# EAGLE board sample (EAGLE 9.5.2)
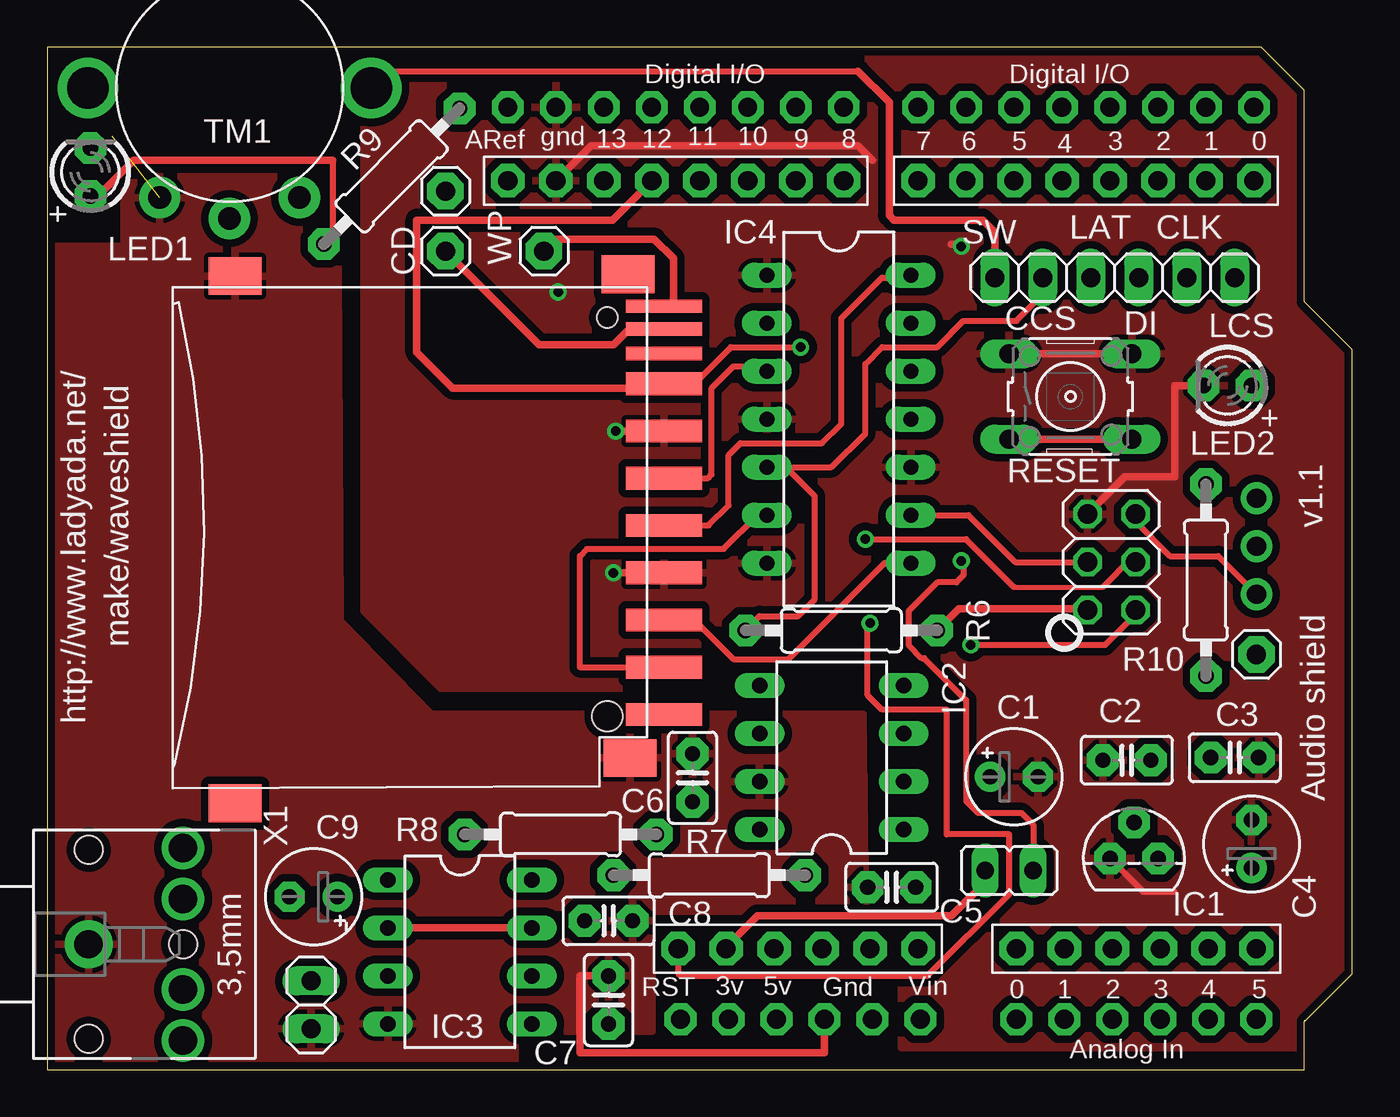
[diagram p0: board, top side]
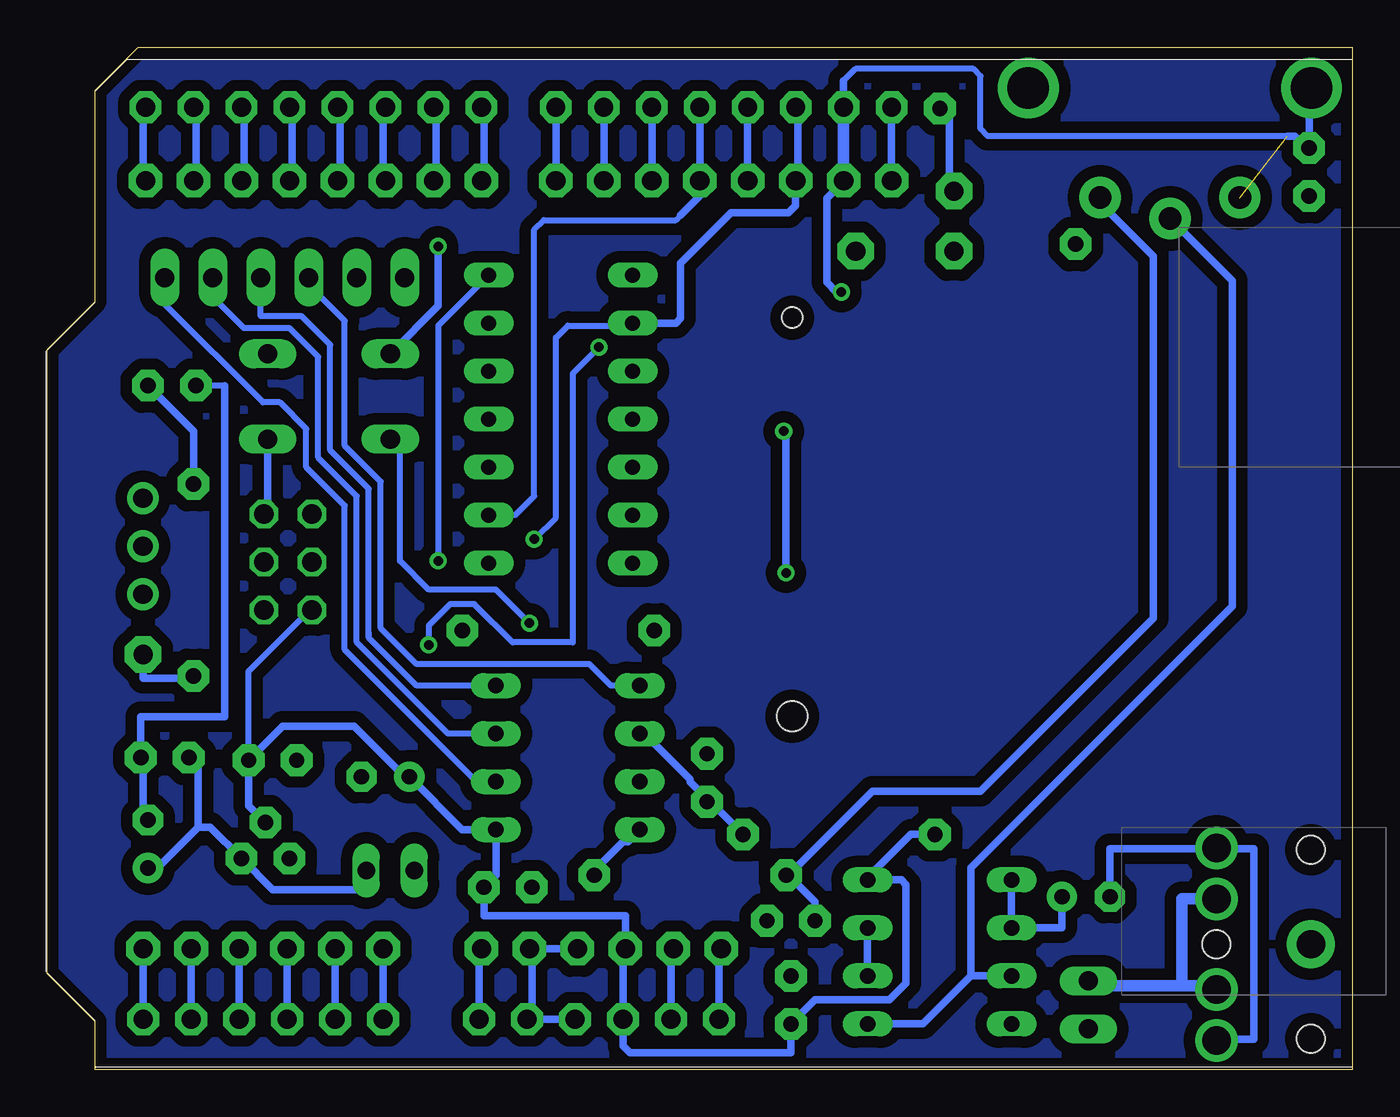
[diagram p1: board, bottom side, seen from below]

Size 69.09 x 54.1 mm. Coordinates in mm from the lower left corner, seen from the top.
Outline: 0,54.1 0,0 66.55,0 66.55,2.54 69.09,5.08 69.09,38.1 66.55,40.64 66.55,51.82 64.26,54.1 0,54.1
Copper layers (1*16): Top 0.035mm / dielectric 1.5mm / Bottom 0.035mm
Design rules "default": minimum track width 10mil, minimum drill 19mil, track to track 12mil, track to pad 12mil, pad to pad 12mil, via to via 12mil, smd to smd 0mil, copper to edge 10mil, drill to drill 8mil, minimum pad ring 10mil, minimum via ring 8mil, stop-mask expansion 4mil, vias tented up to drill 20mil, thermal gap 10mil

## Footprints (pad centres in the part's own frame; a part is rotated, then mirrored left to right if it is on the bottom)
E2,5-5 = drill 0.813 pad 1.6: + -1.27,0 | drill 0.813 pad 1.6 octagon: - 1.27,0
C025-025X050 = drill 0.813 pad 1.676 octagon: 1 -1.27,0; 2 1.27,0
1X01 = drill 1.016 pad 1.93 octagon: 1 0,0
TO92 = drill 0.813 pad 1.676 octagon: 1 -1.27,0; 2 0,1.905; 3 1.27,0
DIL08 = drill 0.813 long: 1 -3.81,-3.81; 2 -1.27,-3.81; 3 1.27,-3.81; 4 3.81,-3.81; 5 3.81,3.81; 6 1.27,3.81; 7 -1.27,3.81; 8 -3.81,3.81
DIL14-LARDO = drill 0.813 long: 1 -7.62,-3.81; 2 -5.08,-3.81; 3 -2.54,-3.81; 4 0,-3.81; 5 2.54,-3.81; 6 5.08,-3.81; 7 7.62,-3.81; 8 7.62,3.81; 9 5.08,3.81; 10 2.54,3.81; 11 0,3.81; 12 -2.54,3.81; 13 -5.08,3.81; 14 -7.62,3.81
2X03 = drill 1.016 octagon: 1 -2.54,-1.27; 2 -2.54,1.27; 3 0,-1.27; 4 0,1.27; 5 2.54,-1.27; 6 2.54,1.27
1X03-CLEANBIG = drill 1.016 pad 1.676: 1 -2.54,0; 2 0,0; 3 2.54,0
1X08-BIG = drill 1.016 pad 1.778 octagon: 1 -8.89,0; 2 -6.35,0; 3 -3.81,0; 4 -1.27,0; 5 1.27,0; 6 3.81,0; 7 6.35,0; 8 8.89,0
1X06-BIG = drill 1.016 pad 1.778 octagon: 1 -6.35,0; 2 -3.81,0; 3 -1.27,0; 4 1.27,0; 5 3.81,0; 6 6.35,0
1X02 = drill 1.016 long: 1 -1.27,0; 2 1.27,0
JP1 = drill 0.914 long: 1 0,-1.27; 2 0,1.27
1X06 = drill 1.016 long: 1 -6.35,0; 2 -3.81,0; 3 -1.27,0; 4 1.27,0; 5 3.81,0; 6 6.35,0
LED3MM = drill 0.813 pad 1.676 octagon: A -1.27,0; K 1.27,0
0207/10 = drill 0.813 pad 1.676 octagon: 1 -5.08,0; 2 5.08,0
B3F-10XX = drill 1.016 long: 1 -3.251,2.261; 2 3.251,2.261; 3 -3.251,-2.261; 4 3.251,-2.261
THUMBWHEEL = drill 1.2 pad 2.184: 1 -3.7,-5.8; 2 0,-6.9; 3 3.7,-5.8 | drill 2.2: SW1 -7.5,0; SW2 7.5,0
ARDUINO-NODIM = drill 1 pad 1.676 octagon: 3V 36.068,2.54; 5V 38.608,2.54; A0 51.308,2.54; A1 53.848,2.54; A2 56.388,2.54; A3 58.928,2.54; A4 61.468,2.54; A5 64.008,2.54; AREF 24.384,50.8; D0 63.881,50.8; D1 61.341,50.8; D2 58.801,50.8; D3 56.261,50.8; D4 53.721,50.8; D5 51.181,50.8; D6 48.641,50.8; D7 46.101,50.8; D8 42.164,50.8; D9 39.624,50.8; D10 37.084,50.8; D11 34.544,50.8; D12 32.004,50.8; D13 29.464,50.8; GND 26.924,50.8; GND1 43.688,2.54; GND2 41.148,2.54; RESET 33.528,2.54; VIN 46.228,2.54
06132 = smd 1.2 x 4: 1 6.9,0.9; 2 4.4,0.9; 3 1.9,0.9; 4 -0.6,0.9; 5 -3.1,0.9; 6 -5.6,0.9; 7 -8.1,0.9; 9 9.4,0.9 | smd 0.7 x 4: 8 -9.7,0.9; CD -11,0.9; WP -12.2,0.9 | smd 2 x 2.8: GP -13.8,-21.8; GP2 14.1,-21.8; GP3 11.7,-0.9; GP4 -13.9,-1 | hole 1.1: -11.6,-2.1 | hole 1.6: 9.5,-2.1
STX3100 = drill 1.5 pad 2.54: 1 2.7,-0.1 | drill 1.5: 2 7.7,5; 3 7.7,2.3; 4 7.7,-2.5; 5 7.7,-5.2 | hole 1.5: 2.7,4.9; 2.7,-5.1; 7.7,-0.1

## Placement (x,y rotation side)
C1  100uF/6V  [E2,5-5]  51.18,15.49 0 top
C2  0.1uF  [C025-025X050]  57.16,16.37 180 top
C3  0.1uF  [C025-025X050]  62.87,16.51 0 top
C4  100uF/6V  [E2,5-5]  63.75,11.94 90 top
C5  0.1uF  [C025-025X050]  44.7,9.65 180 top
C6  0.1uF  [C025-025X050]  34.16,15.44 90 top
C7  0.1uF  [C025-025X050]  29.72,3.68 90 top
C8  0.01uF  [C025-025X050]  29.72,7.87 0 top
C9  100uF/6V  [E2,5-5]  14.1,9.14 180 top
CD  [1X01]  21.08,43.31 0 top
IC1  [TO92]  57.53,11.18 0 top
IC2  MCP4921  [DIL08]  41.53,16.51 90 top
IC3  TL072P  [DIL08]  21.84,6.22 270 top
IC4  74125N-LARDO  [DIL14-LARDO]  41.91,34.42 270 top
ICSP  [2X03]  56.34,26.86 90 top
JP1  [1X03-CLEANBIG]  64.02,27.69 270 top
JP2  [1X08-BIG]  33.27,47.04 0 top
JP4  [1X08-BIG]  54.99,47.04 180 top
JP7  [1X06-BIG]  39.75,6.4 180 top
JP9  [1X06-BIG]  57.66,6.4 0 top
JP11  [1X02]  13.97,3.43 90 top
JP12  [JP1]  50.93,10.54 90 top
JP13  [1X06]  56.52,41.91 180 top
LED1  [LED3MM]  2.29,47.5 90 top
LED2  [LED3MM]  62.48,36.2 180 top
R6  10K  [0207/10]  42.04,23.24 180 top
R7  1.5K  [0207/10]  35.05,10.29 0 top
R8  100K  [0207/10]  27.18,12.45 0 top
R9  4.7K  [0207/10]  18.24,47.27 45 top
R10  4.7K  [0207/10]  61.34,25.91 90 top
RESET  Reset  [B3F-10XX]  54.17,35.62 0 top
TM1  THUMBPOT  [THUMBWHEEL]  9.65,51.94 0 top
U$1  ARDUINODUEMILANOVE-NODIM  [ARDUINO-NODIM]  0,0.13 0 top
U$2  SDMMC06132  [06132]  31.75,28.19 270 top
WP  [1X01]  26.29,43.31 0 top
WP1  [1X01]  21.08,46.48 0 top
WP2  [1X01]  64.01,21.97 0 top
X1  STEREOJACK  [STX3100]  -0.51,6.73 0 top

## Library data of the parts
C1-C9 CD IC1 IC2 IC4 JP1 JP2 JP4 JP7 JP9 LED1 LED2 R6-R10 TM1 U$1 U$2 WP WP1 WP2 X1 = adafruit
IC3 = linear
ICSP JP11 JP13 = pinhead
JP12 = jumper
RESET = switch-omron

## Nets
3.3V: JP7.5 JP12.2 U$1.3V
+3V3: C3.1 C4.+ IC1.3 IC4.14 JP12.1 U$2.4
+5V: C1.+ C2.1 C5.1 C7.1 IC1.2 IC2.1 IC3.8 ICSP.2 JP7.4 R6.1 R8.1 U$1.5V
DAC_CS: IC2.2 JP13.1
DAC_DI: IC2.4 JP13.3
DAC_LATCH: IC2.5 JP13.4
DAC_SCK: IC2.3 JP13.2
GND: C1.- C2.2 C3.2 C4.- C5.2 C6.2 C7.2 C8.2 IC1.1 IC2.7 IC3.4 IC4.1 IC4.4 IC4.7 IC4.10 ICSP.6 JP2.2 JP7.2 JP7.3 JP11.1 LED1.K LED2.K RESET.1 RESET.2 TM1.1 TM1.SW1 U$1.GND U$1.GND1 U$1.GND2 U$2.3 U$2.6 U$2.GP U$2.GP3 X1.1
MISO: ICSP.1 JP2.4 U$1.D12 U$2.7
MMC_CS: IC4.5 JP13.5 R6.2
MOSI: IC4.9 ICSP.4 JP2.5 U$1.D11
N$1: IC3.3 IC3.5 TM1.2
N$2: C9.- X1.2 X1.5
N$3: C9.+ IC3.1 IC3.2 IC3.6 IC3.7
N$4: IC2.8 R7.2
N$5: JP11.2 X1.3 X1.4
N$6: JP9.1 U$1.A0
N$7: JP9.2 U$1.A1
N$8: CD.1 U$2.CD
N$9: JP9.3 U$1.A2
N$10: IC4.6 U$2.1
N$11: IC4.8 U$2.2
N$12: IC4.3 U$2.5
N$13: U$2.WP WP.1
N$14: LED1.A R9.1
N$15: JP7.1 U$1.VIN
N$17: R9.2 WP1.1
N$18: LED2.A R10.2
N$19: C6.1 IC2.6 R8.2
N$20: R10.1 WP2.1
N$21: C8.1 R7.1 TM1.3
N$22: JP9.4 U$1.A3
N$23: JP9.5 U$1.A4
N$24: JP9.6 U$1.A5
N$25: JP4.1 U$1.D0
N$26: JP4.2 U$1.D1
N$27: JP4.3 U$1.D2
N$28: JP4.4 U$1.D3
N$29: JP4.5 U$1.D4
N$30: JP4.6 U$1.D5
N$31: JP4.7 U$1.D6
N$32: JP4.8 U$1.D7
N$33: JP2.1 U$1.AREF
N$34: JP2.6 U$1.D10
N$35: JP2.7 U$1.D9
N$36: JP2.8 U$1.D8
POTSW: JP13.6 TM1.SW2
RESET: ICSP.5 JP1.3 JP7.6 RESET.3 RESET.4 U$1.RESET
SCK: IC4.2 ICSP.3 JP2.3 U$1.D13

## Tracks (layer width: path | path; a pad name or v marks a point on that pad's centre or on a via)
3.3V
  Top 0.406: JP12.2 49.53,10.41 | JP7.5 35.94,6.48 37.59,8.13 47.88,8.13 49.66,9.91 JP12.2 | JP12.2 49.53,10.67
  Bottom 0.406: 35.94,6.48 JP7.5 35.99,6.35 36.07,6.35 U$1.3V
+3V3  (via drill 0.5)
  Top 0.305: IC4.14 45.72,41.91 44.2,41.91 42.04,39.75 42.04,34.16 41.02,33.15 36.7,33.15 36.07,32.51 36.07,29.84 35.02,28.79 U$2.4 | v48.39,26.92 48.51,26.8 48.51,26.16 48.13,25.78 47.12,25.78 45.59,24.26 45.59,22.48 46.29,21.78 46.42,21.78 48.64,19.56 48.64,14.22 49.28,13.59 51.56,13.59 52.2,12.95 52.2,11.56
  Top 0.406: JP12.1 52.2,10.41 | 52.2,11.56 JP12.1 | JP12.1 52.07,10.67 51.94,10.67 51.94,9.65 | 51.82,10.41 51.94,10.54 JP12.1 | U$2.4 32.55,28.79
  Bottom 0.305: IC4.14 48.39,39.37 v48.39,26.92
  Bottom 0.406: C3.1 61.09,16 61.09,12.83 | 64.01,10.67 C4.+ 63.25,10.67 61.09,12.83 | 61.09,12.83 60.45,12.83 IC1.3 57.15,9.53 52.58,9.53 52.07,10.03 52.07,10.67 | 52.07,10.67 52.07,10.79 | JP12.1 52.07,10.67
+5V
  Top 0.406: ICSP.2 55.12,24.36 55.12,24.38 48.26,24.38 R6.1
  Bottom 0.305: ICSP.2 55.08,24.34 55.12,24.38 58.42,21.08 C2.1
  Bottom 0.406: IC1.2 58.42,13.97 C2.1 56.64,18.16 52.83,18.16 50.29,15.62 49.78,15.62 C1.+ 47.12,12.7 IC2.1 45.34,11.05 | 45.34,11.05 45.34,10.92 | 45.34,11.05 45.34,10.29 C5.1 45.97,8.13 38.48,8.13 JP7.4 38.61,6.4 U$1.5V 38.61,1.27 38.23,0.89 29.72,0.89 C7.1 28.45,3.68 24.51,3.68 23.62,4.57 23.62,9.78 23.88,10.03 IC3.8 25.65,10.16 23.37,12.45 R8.1
DAC_CS
  Bottom 0.305: JP13.1 62.87,40.51 57.66,35.31 56.77,35.31 55.37,33.91 55.37,31.88 53.34,29.84 53.34,22.23 46.35,15.24 IC2.2
DAC_DI
  Bottom 0.305: JP13.3 57.78,39.88 55.63,39.88 54.1,38.35 54.1,32.77 52.07,30.73 52.07,23.11 | 52.07,23.11 52.07,22.99 | IC2.4 49.53,20.32 52.07,22.86 52.07,23.11
DAC_LATCH
  Bottom 0.305: 55.24,41.66 JP13.4 55.24,41.53 53.34,39.62 53.34,33.02 51.44,31.11 51.44,23.37 49.53,21.46 40.39,21.46 39.24,20.32 IC2.5 | IC2.5 37.85,20.45 | IC2.5 37.59,20.32
DAC_SCK
  Bottom 0.305: JP13.2 60.2,41.78 60.33,41.66 60.33,40.89 58.67,39.24 56.26,39.24 54.74,37.72 54.74,32.38 52.7,30.35 52.7,22.61 47.88,17.78 IC2.3
GND  (via drill 0.5)  (1 unrouted)
  Top 0.305: IC1.1 58.04,9.4 59.69,9.4 | 63.37,13.21 C4.-
  Top 0.406: 27.05,47.37 27.05,47.17 JP2.2 28.78,48.9 42.93,48.9 43.69,48.13 | RESET.2 57.18,37.88 57.15,37.85 57.12,37.88 RESET.1 | ICSP.6 57.05,31.37 59.69,31.37 59.69,36.2 LED2.K | C7.2 28.19,4.95 28.19,0.89 41.15,0.89 U$1.GND2 | U$2.6 32.64,33.78 v30.1,33.78 | U$2.3 32.77,26.29 | U$2.3 | v29.97,26.29 U$2.3 | v48.39,43.56 48.26,43.69 47.88,43.69
  Bottom 0.305: 3.43,49.4 19.3,49.4 19.68,49.78 19.68,52.58 20.07,52.96 26.29,52.96 26.92,52.32 | 59.69,36.2 LED2.K
  Bottom 0.406: 43.18,6.48 43.26,6.4 JP7.2 43.51,6.35 43.43,6.35 43.43,3.05 | 43.18,6.48 43.1,6.4 JP7.3 41.02,6.99 | C4.- 64.01,13.46 64.01,16.64 C3.2 64.14,18.67 59.69,18.67 59.69,36.2 | 43.43,3.05 43.43,2.85 | 26.8,47.12 26.85,47.12 JP2.2 | 43.18,6.48 42.93,6.48 | 26.92,46.99 27.81,46.1 27.81,41.66 27.3,41.15 v27.05,41.15 | TM1.SW1 2.15,51.81 2.03,51.69 2.29,51.44 LED1.K 2.29,48.64 3.05,49.4 3.43,49.4 | v30.1,33.78 29.97,33.66 v29.97,26.29 | RESET.1 48.39,40.41 v48.39,43.56 | 43.43,2.67 U$1.GND1 | U$1.GND2 43.43,2.67 | 26.92,52.32 U$1.GND | 43.43,2.67 43.43,3.05
  Bottom 0.61: 26.92,46.99 JP2.2 26.92,50.72 26.8,50.72
  pour Top (isolate 0.406): 4.06,47.24 4.06,43.56 0.13,43.56 0.13,-0.89 24.77,-0.89 24.77,2.03 32,2.03 32,8.38 43.31,8.38 43.18,18.8 20.32,18.8 15.49,23.75 15.37,47.24
  pour Top (isolate 0.406): 16.76,53.09 16.76,24.26 20.83,20.19 45.21,20.19 45.21,1.14 66.17,1.14 66.17,2.92 68.71,5.46 68.71,38.48 66.42,40.77 66.42,51.82 64.77,53.47 16.38,53.47
MISO  (via drill 0.5)
  Top 0.305: ICSP.1 57.61,24.17 57.66,24.13 56.01,22.48 v48.9,22.48 | 34.16,36.07 34.16,36.2 36.2,38.23 v39.88,38.23
  Top 0.406: JP2.4 29.92,44.96 19.56,44.96 19.56,37.97 21.46,36.07 32.64,36.07 | 32.64,36.07 32.64,36.08 | 32.64,36.07 34.16,36.07 | U$2.7 32.64,36.32 | U$2.7 | 32.64,36.07 U$2.7
  Bottom 0.305: v39.88,38.23 41.27,36.83 41.27,22.61 44.45,22.61 46.48,24.64 47.75,24.64 48.9,23.5 v48.9,22.48 48.9,22.35
  Bottom 0.406: JP2.4 U$1.D12
MMC_CS
  Top 0.305: 38.23,31.88 39.12,31.88 40.64,30.35 40.64,24.89 39.75,24 37.72,24 R6.2 | JP13.5 52.7,41.02 51.31,39.62 48.51,39.62 47.12,38.23 44.2,38.23 43.31,37.34 43.31,33.66 41.53,31.88 38.23,31.88 | 38.23,31.88 IC4.5
MOSI
  Top 0.305: ICSP.4 51.25,26.86 48.77,29.34 IC4.9
  Bottom 0.305: 35.56,45.21 35.81,44.96 42.8,44.96 43.31,44.45 43.31,30.35 44.32,29.34 IC4.9
  Bottom 0.406: 34.54,46.99 JP2.5 34.47,47.12 | 34.47,47.12 34.42,47.12 34.42,46.35 35.56,45.21 | 34.47,47.12 34.54,47.19 U$1.D11
N$1
  Bottom 0.406: IC3.3 20.19,4.95 | 20.19,4.95 22.73,2.41 25.02,2.41 25.15,2.54 25.53,2.54 IC3.5 | TM1.2 6.35,41.74 6.35,24.51 20.19,10.67 20.19,4.95
N$2
  Bottom 0.406: C9.- 12.83,11.68 7.11,11.68 7.16,11.73 X1.2 7.19,11.89 | X1.5 7.12,1.53 7.11,1.52 7.03,1.61 5.21,1.61 5.21,11.68 6.99,11.68 7.19,11.89 | 7.19,11.89 7.24,11.94
N$3
  Top 0.406: 17.91,7.49 IC3.2 IC3.7
  Bottom 0.406: 25.65,7.62 IC3.7 IC3.6 | IC3.2 18.16,7.62 18.29,7.49 | IC3.2 IC3.1 | IC3.2 15.37,7.49 C9.+
N$4
  Bottom 0.406: IC2.8 38.35,12.06 38.61,12.06 40.26,10.41 R7.2
N$5
  Bottom 0.61: X1.4 7.19,4.45 9.02,4.45 | JP11.2 13.97,4.45 9.02,4.45 | X1.3 9.02,9.03 9.02,4.45
N$6
  Bottom 0.406: 51.31,6.6 JP9.1 U$1.A0
N$7
  Bottom 0.406: U$1.A1 JP9.2
N$8
  Top 0.406: CD.1 26.04,38.35 29.97,38.35 30.73,39.12 32.51,39.12 32.38,39.24 32.64,39.24 | 32.64,39.24 U$2.CD | 32.64,39.24 32.66,39.24
N$9
  Bottom 0.406: U$1.A2 JP9.3
N$10
  Top 0.305: U$2.1 28.19,21.29 28.19,27.18 28.57,27.56 35.81,27.56 37.59,29.34 IC4.6
N$11
  Top 0.305: 32.77,23.88 34.16,23.88 36.32,21.72 39.24,21.72 44.32,26.8 IC4.8
  Top 0.406: 32.68,23.79 32.77,23.88 | U$2.2 32.68,23.79 | 32.68,23.79 32.66,23.77
N$12
  Top 0.305: U$2.5 34.98,31.29 35.18,31.5 35.18,36.07 36.32,37.21 37.72,37.21 37.85,37.21 IC4.3
N$13
  Top 0.406: WP.1 26.92,43.94 32.13,43.94 33.15,42.93 33.15,40.39 33.02,40.26 32.64,40.26 U$2.WP
N$14
  Top 0.305: 15.11,48.09 15.11,43.94
  Top 0.406: 15.11,48.09 15.11,48.13 4.57,48.13 2.67,46.23 LED1.A | R9.1 14.61,43.68 14.61,43.69 14.86,43.94 15.11,43.94
N$15
  Bottom 0.406: JP7.1 46.23,6.4 U$1.VIN
N$16
  pour Bottom (isolate 0.61): -0.38,53.59 -0.38,0.38 66.55,0.13 66.55,3.43 68.96,5.84 69.09,37.97 66.67,40.13 66.67,52.58 65.91,53.59
N$17
  Bottom 0.406: WP1.1 21.34,46.74 21.34,50.43 21.35,50.43 21.83,50.91 | 21.83,50.91 21.84,50.93 | 21.83,50.91 R9.2
N$18
  Bottom 0.406: R10.2 61.34,33.78 LED2.A
N$19
  Bottom 0.406: R8.2 33.98,14.17 C6.1 34.09,14.17 34.04,14.22 35.05,15.24 35.05,15.37 37.47,17.78 IC2.6 37.85,17.78
N$20
  Bottom 0.406: R10.1 61.34,20.7 64.01,20.7 WP2.1
N$21
  Bottom 0.406: C8.1 28.45,8.89 29.97,10.41 R7.1 29.84,10.29 25.4,14.73 19.68,14.73 10.54,23.88 10.54,43.05 13.35,45.86 TM1.3
N$22
  Bottom 0.406: U$1.A3 JP9.4
N$23
  Bottom 0.406: U$1.A4 JP9.5
N$24
  Bottom 0.406: U$1.A5 JP9.6
N$25
  Bottom 0.406: U$1.D0 64.01,51.05 64.01,47.17 JP4.1
N$26
  Bottom 0.406: U$1.D1 61.21,51.05 61.21,47.17 JP4.2
N$27
  Bottom 0.406: U$1.D2 58.67,51.05 58.67,47.17 JP4.3
N$28
  Bottom 0.406: U$1.D3 56.13,50.8 56.13,47.17 JP4.4
N$29
  Bottom 0.406: U$1.D4 53.59,50.8 53.59,47.17 JP4.5
N$30
  Bottom 0.406: U$1.D5 51.31,51.05 51.31,47.17 JP4.6
N$31
  Bottom 0.406: U$1.D6 48.51,50.8 48.51,47.17 JP4.7
N$32
  Bottom 0.406: U$1.D7 45.97,51.05 45.97,47.17 JP4.8
N$33
  Bottom 0.406: 24.38,46.99 JP2.1 U$1.AREF
N$34
  Bottom 0.406: JP2.6 U$1.D10
N$35
  Bottom 0.406: JP2.7 U$1.D9
N$36
  Bottom 0.406: JP2.8 U$1.D8
POTSW
  Top 0.305: 17.78,52.83 42.93,52.83
  Top 0.406: JP13.6 50.16,44.32 49.53,44.96 44.83,44.96 44.58,45.21 44.58,51.18 42.93,52.83 | 17.78,52.83 17.27,52.32 17.27,51.82 17.15,51.7 | 17.15,51.7 17.14,51.69 | TM1.SW2 17.15,51.7
RESET  (via drill 0.5)
  Top 0.305: JP1.3 61.99,27.18 59.44,27.18 57.66,28.96 57.66,29.35 ICSP.5 | JP7.6 33.4,5.08 33.53,4.95 46.61,4.95 50.93,9.27 50.93,12.45 47.62,12.45 47.62,19.05 44.2,19.05 43.43,19.81 43.43,23.5 v43.56,23.62
  Top 0.406: JP1.3 64.02,25.02 | RESET.4 57.07,33.36 57.02,33.4 56.98,33.36 RESET.3 | JP7.6 33.4,6.48
  Bottom 0.305: RESET.3 50.42,32.86 50.42,26.92 48.9,25.4 45.34,25.4 v43.56,23.62
  Bottom 0.406: 56.98,33.36 57.28,33.66 57.42,33.51 RESET.4 57.42,29.7 57.61,29.51 ICSP.5 57.8,29.21 | JP7.6 33.45,6.35 33.53,6.35 U$1.RESET
SCK  (via drill 0.5)
  Top 0.254: 51.18,25.53 55.88,25.53
  Top 0.305: ICSP.3 57.53,26.94 57.53,27.05 57.4,27.05 55.88,25.53 | 51.18,25.53 48.64,28.07 v43.31,28.07
  Bottom 0.305: v43.31,28.07 42.16,29.21 42.16,38.73 41.53,39.37 38.23,39.37 IC4.2
  Bottom 0.406: JP2.3 29.34,47.17 29.34,50.8 29.41,50.8 29.46,50.85 U$1.D13 29.46,51.05 | JP2.3 29.46,47.12 | JP2.3 29.46,45.72 29.84,45.34 32.89,45.34 35.56,42.67 35.56,39.75 35.81,39.5 IC4.2

## Text on the board
tNames: SW | LAT | CLK | CCS | DI | LCS | v1.1 | make/waveshield | http://www.ladyada.net/ | Audio shield | -